# Altium PCB PCB3.pcbdoc
Units mil, origin at the board's own origin, x right, y up, seen from the top; angles counter-clockwise.
Board outline 4437.01 x 5591.14 mil, 2 copper layers (Top Layer, Bottom Layer); 51 components, 35 nets, 216 pads, 8 vias.
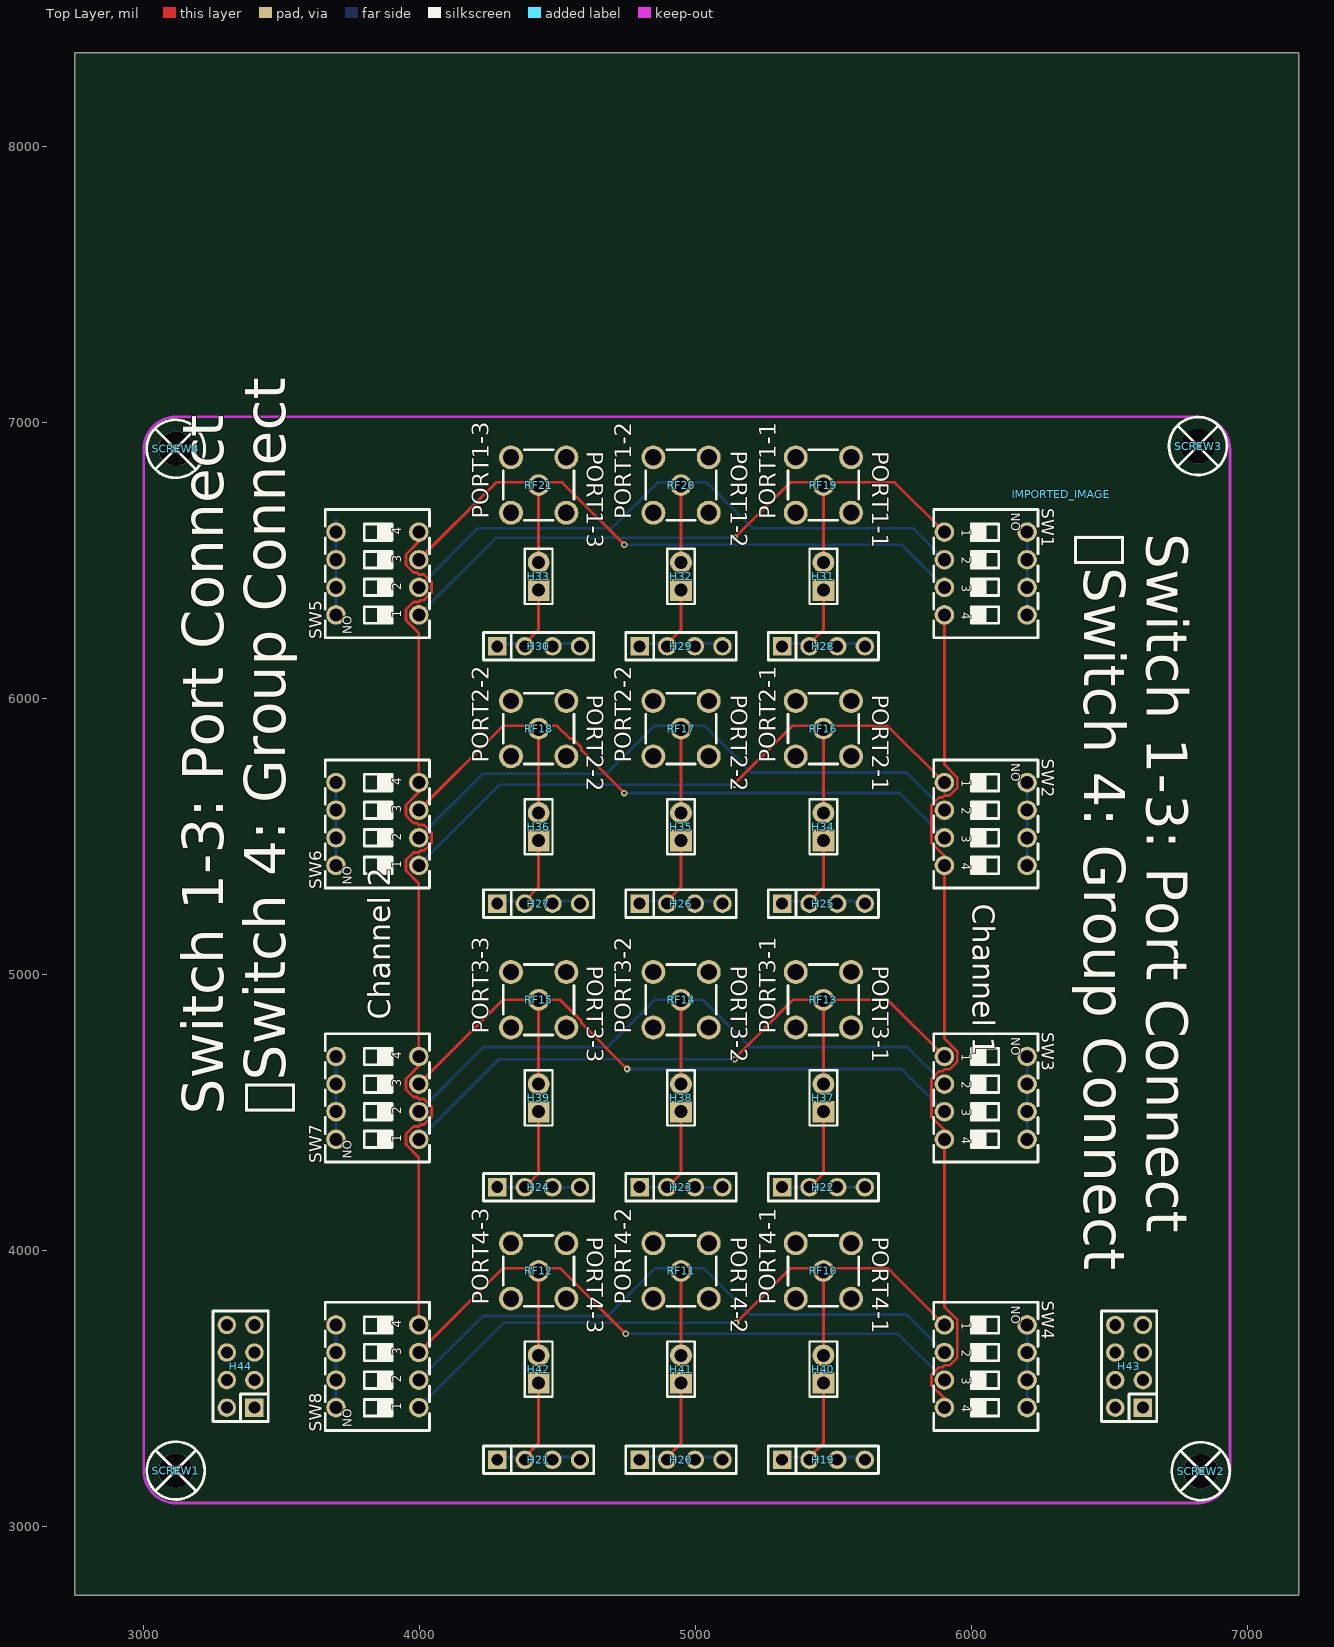
[diagram p0: Top Layer view]
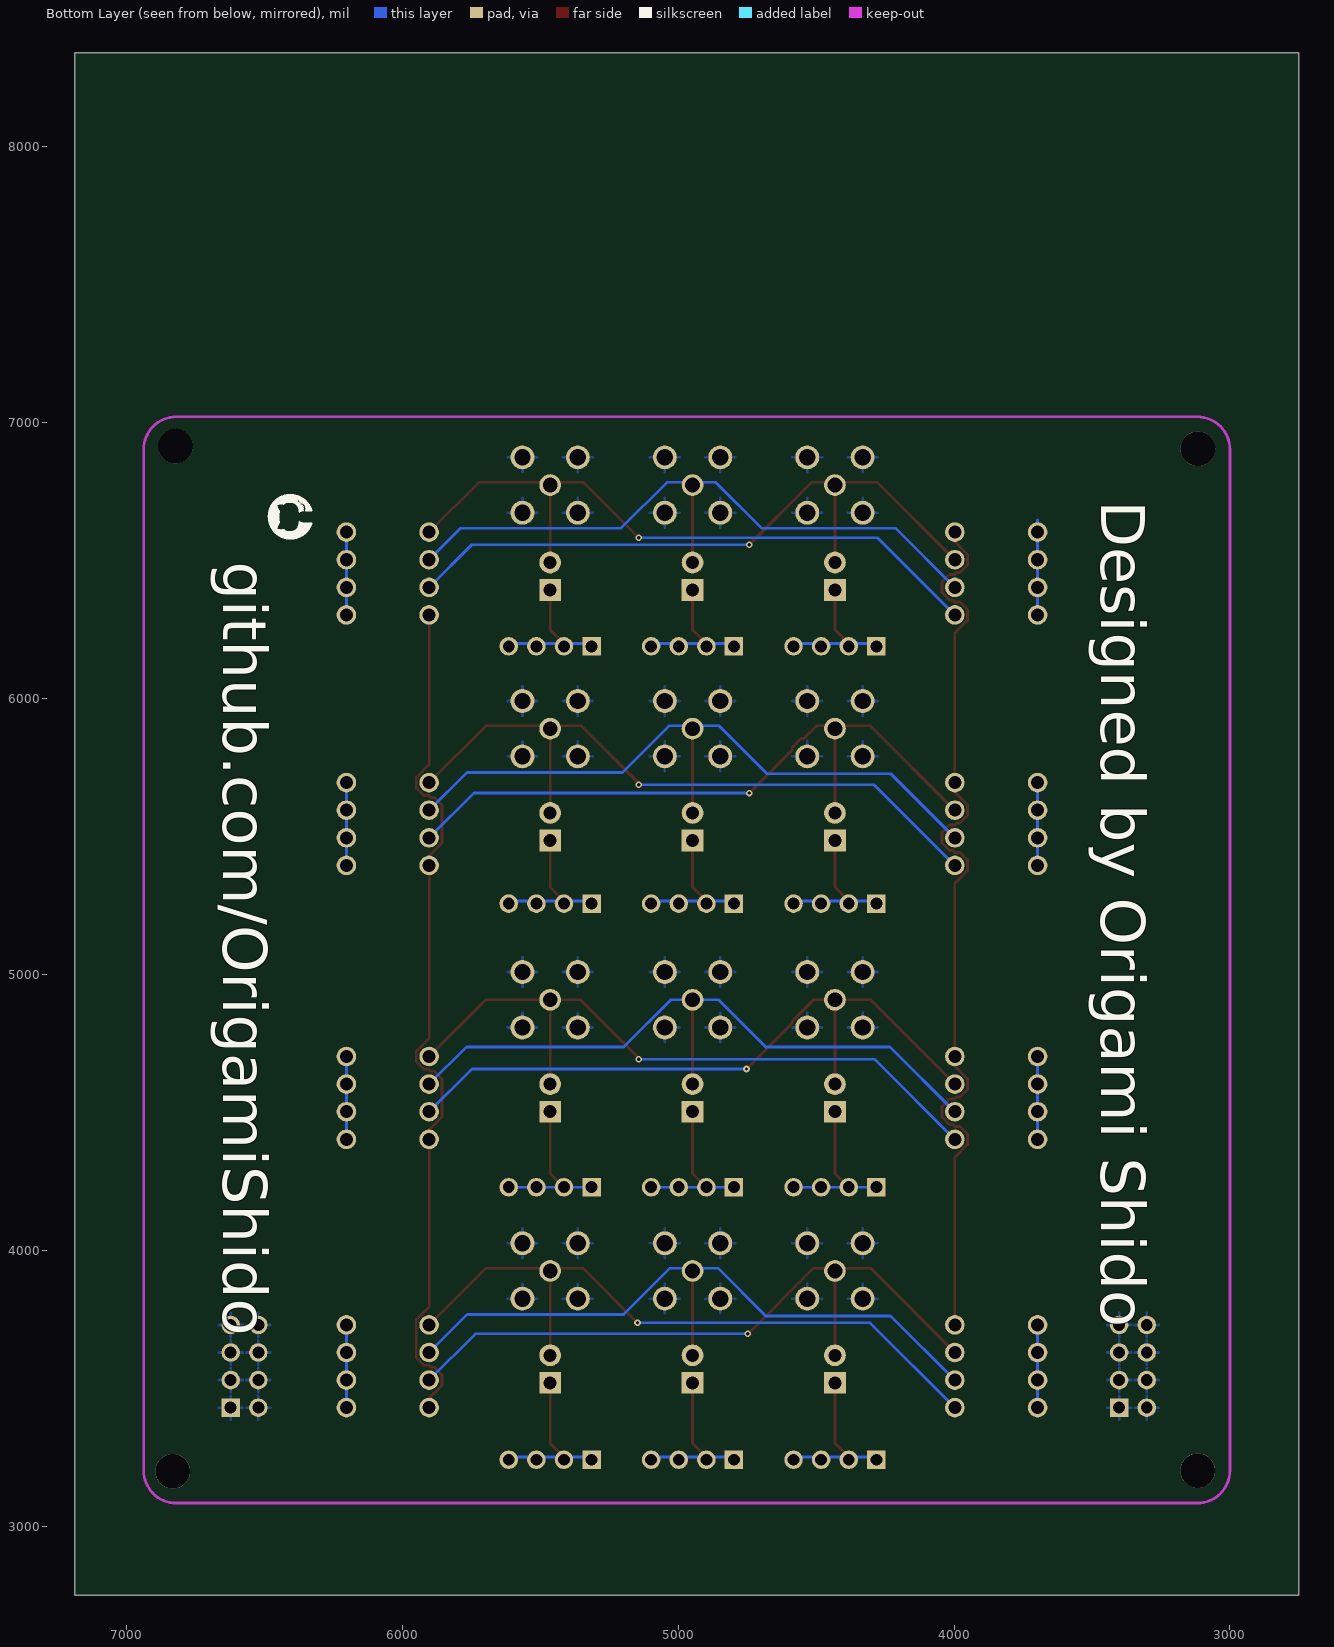
[diagram p1: Bottom Layer view, seen from below]

## Layer stack, top to bottom
Top Layer: signal copper (thickness not stored)
Dielectric: dielectric 12.6, FR-4, Dk 4.8
Bottom Layer: signal copper (thickness not stored)

## Board outline
7187.01,2750 2750,2750 2750,8341.14 7187.01,8341.14

## Design rules (kind name [scope] priority, off if disabled: settings)
BoardOutlineClearance copperThickness1oz [All] p0: genericclearance=10 ignorepadtopadclearanceinfootprint=FALSE except(0: Arc-SplitContinuation Track-SplitContinuation SMDPad-SplitContinuation THPad-SplitContinuation Via-SplitContinuation Fill-SplitContinuation Poly-SplitContinuation Region-SplitContinuation Text-SplitContinuation; 6: Track-CutoutEdge SMDPad-CutoutEdge THPad-CutoutEdge Via-CutoutEdge Region-CutoutEdge; 11.8: Track-OutlineEdge SMDPad-OutlineEdge THPad-OutlineEdge Via-OutlineEdge Fill-OutlineEdge Region-OutlineEdge Poly-OutlineEdge Text-OutlineEdge Fill-CutoutEdge)
BoardOutlineClearance copperThickness2oz [All] p0: genericclearance=10 ignorepadtopadclearanceinfootprint=FALSE except(0: Arc-SplitContinuation Track-SplitContinuation SMDPad-SplitContinuation THPad-SplitContinuation Via-SplitContinuation Fill-SplitContinuation Poly-SplitContinuation Region-SplitContinuation Text-SplitContinuation; 6: Track-CutoutEdge SMDPad-CutoutEdge THPad-CutoutEdge Via-CutoutEdge Region-CutoutEdge; 11.8: Track-OutlineEdge SMDPad-OutlineEdge THPad-OutlineEdge Via-OutlineEdge Fill-OutlineEdge Region-OutlineEdge Poly-OutlineEdge Text-OutlineEdge Fill-CutoutEdge)
Clearance copperThickness1oz [(InNet('$1N5435') OR InNet('$1N5447') OR InNet('$1N5308') OR InNet('$1N5399') OR InNet('$1N5411') OR InNet('$1N5423') OR InNet('$1N5363') OR InNet('$1N5375') OR InNet('$1N5387') OR InNet('$1N5101') OR InNet('$1N5339') OR InNet('$1N5351') OR InNet('$1N5094') OR InNet('$1N5332') OR InNet('$1N5344') OR InNet('$1N5356') OR InNet('$1N5368') OR InNet('$1N5380') OR InNet('$1N5392') OR InNet('$1N5404') OR InNet('$1N5416') OR InNet('$1N5428') OR InNet('$1N5440') OR InNet('$1N5451') OR InNet('GND') OR InNet('$1N5611') OR InNet('$1N5702') OR InNet('$1N5632') OR InNet('$1N5654') OR InNet('$1N5734') OR InNet('$1N8243') OR InNet('$1N8799') OR InNet('$1N8264') OR InNet('$1N8286') OR InNet('$1N8697'))] p1: gap=7 ignorepadtopadclearanceinfootprint=FALSE except(4: Track-Track; 6: Track-SMDPad SMDPad-SMDPad Track-THPad SMDPad-THPad THPad-THPad Track-Via SMDPad-Via THPad-Via Via-Via SMDPad-Fill THPad-Fill Via-Fill Fill-Fill Track-Region SMDPad-Region THPad-Region Via-Region Region-Region Track-Poly SMDPad-Poly THPad-Poly Via-Poly Fill-Poly Region-Poly Poly-Poly Track-Text SMDPad-Text THPad-Text Via-Text Fill-Text Region-Text Poly-Text Text-Text; 6.9: Track-Hole SMDPad-Hole THPad-Hole Via-Hole Fill-Hole Region-Hole Poly-Hole Text-Hole Sheet-Hole; 11.8: Track-Fill Fill-Region Track-Sheet SMDPad-Sheet THPad-Sheet Via-Sheet Fill-Sheet Region-Sheet Poly-Sheet Text-Sheet)
Clearance copperThickness2oz [All] p1: gap=7 ignorepadtopadclearanceinfootprint=FALSE except(6: Track-SMDPad SMDPad-SMDPad Track-THPad SMDPad-THPad THPad-THPad Track-Via SMDPad-Via THPad-Via Via-Via SMDPad-Fill THPad-Fill Via-Fill Fill-Fill Track-Region SMDPad-Region THPad-Region Via-Region Region-Region Track-Poly SMDPad-Poly THPad-Poly Via-Poly Fill-Poly Region-Poly Poly-Poly Track-Text SMDPad-Text THPad-Text Via-Text Fill-Text Region-Text Poly-Text Text-Text; 6.9: Track-Hole SMDPad-Hole THPad-Hole Via-Hole Fill-Hole Region-Hole Poly-Hole Text-Hole Sheet-Hole; 8: Track-Track; 11.8: Track-Fill Fill-Region Track-Sheet SMDPad-Sheet THPad-Sheet Via-Sheet Fill-Sheet Region-Sheet Poly-Sheet Text-Sheet)
DiffPairsRouting differentialPair [All] p1: maxuncoupledlength=10 minlimit=6 maxlimit=6 mostfreqgap=6 toplayer_minwidth=5 toplayer_prefwidth=10 toplayer_maxwidth=100 bottomlayer_minwidth=5 bottomlayer_prefwidth=10 bottomlayer_maxwidth=100
PasteMaskExpansion pasteMaskExpansion [All] p1: expansion=0
PlaneConnect innerPlane [All] p1: planeconnectstyle=Relief reliefexpansion=20 reliefentries=4 reliefconductorwidth=10 reliefairgap=10
PolygonConnect copperRegion [All] p1: connectstyle=Relief reliefentries=4 reliefconductorwidth=10 polygonreliefangle="90 Angle" airgapwidth=10
RoutingVias viaSize [All] p1: viastyle="Through Hole" holewidth=12.0078 minholewidth=11.811 maxholewidth=248.0314 width=24.0158 minwidth=19.685 maxwidth=393.7008
SolderMaskExpansion solderMaskExpansion [All] p1: useseparateexpansions=TRUE expansion=2 expansionbottom=2
Width copperThickness1oz [All] p1: maxlimit=100 minlimit=5 preferedwidth=10
Width copperThickness2oz [All] p1: maxlimit=100 minlimit=8 preferedwidth=10

## Components (designator, comment, footprint, x,y, rotation, side; value= is the part's Value field where it differs from the comment)
H19 "PZ254V-11-04P" HDR-TH_4P-P2.54-V-M 5463.74,3241.4 r0 top
H20 "PZ254V-11-04P" HDR-TH_4P-P2.54-V-M 4947.63,3241.4 r0 top
H21 "PZ254V-11-04P" HDR-TH_4P-P2.54-V-M 4431.53,3241.4 r0 top
H22 "PZ254V-11-04P" HDR-TH_4P-P2.54-V-M 5463.74,4229.14 r0 top
H23 "PZ254V-11-04P" HDR-TH_4P-P2.54-V-M 4947.63,4229.14 r0 top
H24 "PZ254V-11-04P" HDR-TH_4P-P2.54-V-M 4431.53,4229.14 r0 top
H25 "PZ254V-11-04P" HDR-TH_4P-P2.54-V-M 5463.74,5256.88 r0 top
H26 "PZ254V-11-04P" HDR-TH_4P-P2.54-V-M 4947.63,5256.88 r0 top
H27 "PZ254V-11-04P" HDR-TH_4P-P2.54-V-M 4431.53,5256.88 r0 top
H28 "PZ254V-11-04P" HDR-TH_4P-P2.54-V-M 5463.74,6189.63 r0 top
H29 "PZ254V-11-04P" HDR-TH_4P-P2.54-V-M 4947.63,6189.63 r0 top
H30 "PZ254V-11-04P" HDR-TH_4P-P2.54-V-M 4431.53,6189.63 r0 top
H31 "PZ254V-11-02P" HDR-TH_2P-P2.54-V-M 5463.74,6443.31 r90 top
H32 "PZ254V-11-02P" HDR-TH_2P-P2.54-V-M 4947.63,6443.31 r90 top
H33 "PZ254V-11-02P" HDR-TH_2P-P2.54-V-M 4431.53,6443.31 r90 top
H34 "PZ254V-11-02P" HDR-TH_2P-P2.54-V-M 5463.74,5535.57 r90 top
H35 "PZ254V-11-02P" HDR-TH_2P-P2.54-V-M 4947.63,5535.57 r90 top
H36 "PZ254V-11-02P" HDR-TH_2P-P2.54-V-M 4431.53,5535.57 r90 top
H37 "PZ254V-11-02P" HDR-TH_2P-P2.54-V-M 5463.74,4552.83 r90 top
H38 "PZ254V-11-02P" HDR-TH_2P-P2.54-V-M 4947.63,4552.83 r90 top
H39 "PZ254V-11-02P" HDR-TH_2P-P2.54-V-M 4431.53,4552.83 r90 top
H40 "PZ254V-11-02P" HDR-TH_2P-P2.54-V-M 5463.74,3570.08 r90 top
H41 "PZ254V-11-02P" HDR-TH_2P-P2.54-V-M 4947.63,3570.08 r90 top
H42 "PZ254V-11-02P" HDR-TH_2P-P2.54-V-M 4431.53,3570.08 r90 top
H43 "PZ254V-12-8P" HDR-TH_8P-P2.54-V-M-R2-C4-S2.54 6571.43,3580.08 r90 top
H44 "PZ254V-12-8P" HDR-TH_8P-P2.54-V-M-R2-C4-S2.54 3351.43,3580.08 r90 top
IMPORTED_IMAGE "IMPORTED_IMAGE" IMPORTED_IMAGE 6326.43,6740.8 r0 top
RF10 "BWSMA-KE-Z001_C496549" SMA-TH_BWSMA-KE-Z001 5463.74,3925.75 r270 top
RF11 "BWSMA-KE-Z001_C496549" SMA-TH_BWSMA-KE-Z001 4947.63,3925.75 r270 top
RF12 "BWSMA-KE-Z001_C496549" SMA-TH_BWSMA-KE-Z001 4431.53,3925.75 r270 top
RF13 "BWSMA-KE-Z001_C496549" SMA-TH_BWSMA-KE-Z001 5463.74,4908.5 r270 top
RF14 "BWSMA-KE-Z001_C496549" SMA-TH_BWSMA-KE-Z001 4947.63,4908.5 r270 top
RF15 "BWSMA-KE-Z001_C496549" SMA-TH_BWSMA-KE-Z001 4431.53,4908.5 r270 top
RF16 "BWSMA-KE-Z001_C496549" SMA-TH_BWSMA-KE-Z001 5463.74,5891.24 r270 top
RF17 "BWSMA-KE-Z001_C496549" SMA-TH_BWSMA-KE-Z001 4947.63,5891.24 r270 top
RF18 "BWSMA-KE-Z001_C496549" SMA-TH_BWSMA-KE-Z001 4431.53,5891.24 r270 top
RF19 "BWSMA-KE-Z001_C496549" SMA-TH_BWSMA-KE-Z001 5463.74,6773.98 r270 top
RF20 "BWSMA-KE-Z001_C496549" SMA-TH_BWSMA-KE-Z001 4947.63,6773.98 r270 top
RF21 "BWSMA-KE-Z001_C496549" SMA-TH_BWSMA-KE-Z001 4431.53,6773.98 r270 top
SCREW1 "M3螺丝" M3螺丝 3116.43,3201.95 r0 top
SCREW2 "M3螺丝" M3螺丝 6831.33,3200 r0 top
SCREW3 "M3螺丝" M3螺丝 6821.33,6915.31 r0 top
SCREW4 "M3螺丝" M3螺丝 3116.02,6905.31 r0 top
SW1 "DSWB04LHGET" SW-TH_DSWB04LHGET 6052.16,6453.31 r270 top
SW2 "DSWB04LHGET" SW-TH_DSWB04LHGET 6052.16,5545.57 r270 top
SW3 "DSWB04LHGET" SW-TH_DSWB04LHGET 6052.16,4552.83 r270 top
SW4 "DSWB04LHGET" SW-TH_DSWB04LHGET 6052.16,3580.08 r270 top
SW5 "DSWB04LHGET" SW-TH_DSWB04LHGET 3847.16,6453.31 r90 top
SW6 "DSWB04LHGET" SW-TH_DSWB04LHGET 3847.16,5545.57 r90 top
SW7 "DSWB04LHGET" SW-TH_DSWB04LHGET 3847.16,4552.83 r90 top
SW8 "DSWB04LHGET" SW-TH_DSWB04LHGET 3847.16,3580.08 r90 top

## Footprints (in the part's own frame and the unit in brackets; to place one, negate y for a bottom-side part, rotate by r counter-clockwise, add the part's x,y. Pads: shape width x height; smd on the part's side, far side on the other; paste and mask are expansions set on the pad)
HDR-TH_2P-P2.54-V-M [mm]
  rect 2x2 hole 1.2: 1(-1.27,0)
  round 2 hole 1.2: 2(1.27,0)
  silkscreen extent -2.54,-1.27 2.54,1.27
HDR-TH_4P-P2.54-V-M [mm]
  rect 1.7x1.7 hole 1.1: 1(-3.81,0)
  round 1.7 hole 1.1: 2(-1.27,0) 3(1.27,0) 4(3.81,0)
  silkscreen extent -5.08,-1.27 5.08,1.27
HDR-TH_8P-P2.54-V-M-R2-C4-S2.54 [mm]
  rect 1.7x1.7 hole 1.1: 1(-3.81,-1.27)
  round 1.7 hole 1.1: 2(-3.81,1.27) 3(-1.27,-1.27) 4(-1.27,1.27) 5(1.27,-1.27) 6(1.27,1.27) 7(3.81,-1.27) 8(3.81,1.27)
  silkscreen extent -5.08,-2.54 5.08,2.54
IMPORTED_IMAGE [mil]
M3螺丝 [mil]
  round 126 hole 126: 1(0,0)
  silkscreen extent -105,-105 105,105
SMA-TH_BWSMA-KE-Z001 [mm]
  round 2.2 hole 1.5: 1(-2.55,-2.55) 2(-2.55,2.55) 3(2.55,2.55)
  round 2.2 hole 1.5 copper offset 0,0: 4(2.55,-2.55)
  round 2 hole 1.35: 5(0,0)
  silkscreen extent -3.25,-3.25 3.25,3.25
SW-TH_DSWB04LHGET [mm]
  round 1.8 hole 1.2: 1(-3.81,3.81) 2(-1.27,3.81) 3(1.27,3.81) 4(3.81,3.81) 5(-3.81,-3.81) 6(-1.27,-3.81) 7(1.27,-3.81) 8(3.81,-3.81)
  silkscreen extent -5.9,-4.8 5.9,4.8

## Via types
v1: diameter 24.02, hole 12.01, Top Layer to Bottom Layer, 8 vias

## Nets (pads, with @x,y where several pads share a name; then routed paths per layer and width w, separated by ;. In a path a pad name is that pad's centre, name@x,y a point inside that pad or via, vN(x,y) a via of type N, cw(c..) or ccw(c..) an arc to the next point about the centre after c; other vN are vias at no path point)
$1N5094: H31.2 RF19.5 SW1.5 SW5.5 | length 2459.6
  Top Layer w10: v1(5142.16,6582.68) 5343.47,6783.99 RF19.5@5463.74,6783.99 ; H31.2@5463.74,6503.32 RF19.5@5463.74,6783.99 ; SW1.5 5721.49,6783.99 RF19.5@5463.74,6783.99
  Bottom Layer w10: SW5.5 4276.54,6582.68 v1(5142.16,6582.68)
$1N5101: H28.1 H28.2 H28.3 H28.4 H31.1 | length 524.4
  Top Layer w10: H28.2@5413.73,6199.63 5463.73,6249.63 H31.1@5463.73,6403.31
  Bottom Layer w10: H28.1@5313.73,6199.63 H28.4@5613.73,6199.63
$1N5308: H21.1 H21.2 H21.3 H21.4 H42.1 | length 599.4
  Top Layer w10: H21.2@4381.53,3251.4 4431.53,3301.4 H42.1@4431.53,3530.08
  Bottom Layer w10: H21.1@4281.53,3251.4 H21.4@4581.53,3251.4
$1N5332: H32.2 RF20.5 SW1.6 SW5.6 | length 2459.6
  Top Layer w10: H32.2@4947.64,6503.32 RF20.5@4947.64,6783.99
  Bottom Layer w10: SW5.6 4211.54,6617.68 4697.16,6617.68 4863.47,6783.99 5040.86,6783.99 5207.16,6617.68 5787.79,6617.68 SW1.6
$1N5339: H29.1 H29.2 H29.3 H29.4 H32.1 | length 524.4
  Top Layer w10: H29.2@4897.63,6199.63 4947.63,6249.63 H32.1@4947.63,6403.31
  Bottom Layer w10: H29.1@4797.63,6199.63 H29.4@5097.63,6199.63
$1N5344: H33.2 RF21.5 SW1.7 SW5.7 | length 2459.6
  Top Layer w10: SW5.7 4277.84,6783.99 RF21.5@4431.54,6783.99 ; H33.2@4431.54,6503.32 RF21.5@4431.54,6783.99 ; v1(4742.16,6557.68) 4515.86,6783.99 RF21.5@4431.54,6783.99
  Bottom Layer w10: v1(4742.16,6557.68) 5747.79,6557.68 SW1.7
$1N5351: H30.1 H30.2 H30.3 H30.4 H33.1 | length 524.4
  Top Layer w10: H30.2@4381.53,6199.63 4431.53,6249.63 H33.1@4431.53,6403.31
  Bottom Layer w10: H30.1@4281.53,6199.63 H30.4@4581.53,6199.63
$1N5356: H34.2 RF16.5 SW2.5 SW6.5 | length 2505.3
  Top Layer w10: v1@5137.16,5687.68 5350.73,5901.24 RF16.5@5463.74,5901.24 ; H34.2@5463.74,5595.57 RF16.5@5463.74,5901.24 ; SW2.5 5696.49,5901.24 RF16.5@5463.74,5901.24
  Bottom Layer w10: SW6.5 4289.28,5687.68 v1@5137.16,5687.68
  other v1: 5142.16,5687.68
$1N5363: H25.1 H25.2 H25.3 H25.4 H34.1 | length 549.4
  Top Layer w10: H25.2@5413.73,5266.88 5463.73,5316.88 H34.1@5463.73,5495.57
  Bottom Layer w10: H25.1@5313.73,5266.88 H25.4@5613.73,5266.88
$1N5368: H35.2 RF17.5 SW2.6 SW6.6 | length 2505.3
  Top Layer w10: H35.2@4947.64,5595.57 RF17.5@4947.64,5901.24
  Bottom Layer w10: SW6.6 4229.28,5727.68 4677.16,5727.68 4850.73,5901.24 5033.6,5901.24 5202.16,5732.68 5765.05,5732.68 SW2.6
$1N5375: H26.1 H26.2 H26.3 H26.4 H35.1 | length 549.4
  Top Layer w10: H26.2@4897.63,5266.88 4947.63,5316.88 H35.1@4947.63,5495.57
  Bottom Layer w10: H26.1@4797.63,5266.88 H26.4@5097.63,5266.88
$1N5380: H36.2 RF18.5 SW2.7 SW6.7 | length 2511
  Top Layer w10: SW6.7 4302.84,5901.24 RF18.5@4431.54,5901.24 ; H36.2@4431.54,5595.57 RF18.5@4431.54,5901.24 ; v1(4742.16,5657.68) 4586.22,5813.63 4586.22,5823.33 4554.41,5855.13 4544.71,5855.13 4498.6,5901.24 RF18.5@4431.54,5901.24
  Bottom Layer w10: v1(4742.16,5657.68) 5740.05,5657.68 SW2.7
$1N5387: H27.1 H27.2 H27.3 H27.4 H36.1 | length 549.4
  Top Layer w10: H27.2@4381.53,5266.88 4431.53,5316.88 H36.1@4431.53,5495.57
  Bottom Layer w10: H27.1@4281.53,5266.88 H27.4@4581.53,5266.88
$1N5392: H37.2 RF13.5 SW3.5 SW7.5 | length 2505.3
  Top Layer w10: v1@5137.16,4692.68 5352.98,4908.5 RF13.5 ; H37.2 RF13.5 ; SW3.5 5696.49,4908.5 RF13.5
  Bottom Layer w10: SW7.5 4287.02,4692.68 v1@5137.16,4692.68
  other v1: 5142.16,4692.68
$1N5399: H22.1 H22.2 H22.3 H22.4 H37.1 | length 594.4
  Top Layer w10: H22.2 5463.73,4279.14 H37.1
  Bottom Layer w10: H22.1 H22.2 H22.3 H22.4
$1N5404: H38.2 RF14.5 SW3.6 SW7.6 | length 2505.3
  Top Layer w10: H38.2 RF14.5
  Bottom Layer w10: SW7.6 4232.02,4737.68 4682.16,4737.68 4852.98,4908.5 RF14.5 5026.35,4908.5 5197.16,4737.68 5767.31,4737.68 SW3.6
$1N5411: H23.1 H23.2 H23.3 H23.4 H38.1 | length 594.4
  Top Layer w10: H23.2 4947.63,4279.14 H38.1
  Bottom Layer w10: H23.1 H23.2 H23.3 H23.4
$1N5416: H39.2 RF15.5 SW3.7 SW7.7 | length 2509.4
  Top Layer w10: SW7.7 4302.84,4908.5 RF15.5 ; H39.2 RF15.5 ; v1(4752.16,4657.68) 4586.22,4823.63 4586.22,4830.59 4508.31,4908.5 RF15.5
  Bottom Layer w10: v1(4752.16,4657.68) 5747.31,4657.68 SW3.7
$1N5423: H24.1 H24.2 H24.3 H24.4 H39.1 | length 594.4
  Top Layer w10: H24.2 4431.53,4279.14 H39.1
  Bottom Layer w10: H24.1 H24.2 H24.3 H24.4
$1N5428: H40.2 RF10.5 SW4.5 SW8.5 | length 2505.3
  Top Layer w10: v1(5147.16,3737.68) 5345.24,3935.76 RF10.5@5463.74,3935.76 ; H40.2@5463.74,3630.09 RF10.5@5463.74,3935.76 ; SW4.5 5696.49,3935.76 RF10.5@5463.74,3935.76
  Bottom Layer w10: SW8.5 4304.76,3737.68 v1(5147.16,3737.68)
$1N5435: H19.1 H19.2 H19.3 H19.4 H40.1 | length 599.4
  Top Layer w10: H19.2@5413.73,3251.4 5463.73,3301.4 H40.1@5463.73,3530.08
  Bottom Layer w10: H19.1@5313.73,3251.4 H19.4@5613.73,3251.4
$1N5440: H41.2 RF11.5 SW4.6 SW8.6 | length 2505.3
  Top Layer w10: H41.2@4947.64,3630.09 RF11.5@4947.64,3935.76
  Bottom Layer w10: SW8.6 4229.76,3762.68 4682.16,3762.68 4855.24,3935.76 5029.09,3935.76 5197.16,3767.68 5764.57,3767.68 SW4.6
$1N5447: H20.1 H20.2 H20.3 H20.4 H41.1 | length 599.4
  Top Layer w10: H20.2@4897.63,3251.4 4947.63,3301.4 H41.1@4947.63,3530.08
  Bottom Layer w10: H20.1@4797.63,3251.4 H20.4@5097.63,3251.4
$1N5451: H42.2 RF12.5 SW4.7 SW8.7 | length 2505.3
  Top Layer w10: SW8.7 4302.84,3935.76 RF12.5@4431.54,3935.76 ; H42.2@4431.54,3630.09 RF12.5@4431.54,3935.76 ; v1(4747.16,3697.68) 4509.09,3935.76 RF12.5@4431.54,3935.76
  Bottom Layer w10: v1(4747.16,3697.68) 5734.57,3697.68 SW4.7
$1N5611: SW1.1 SW1.2 SW1.3 SW1.4 | length 300
  Bottom Layer w10: SW1.4@6202.16,6302.68 SW1.3 SW1.2 SW1.1@6202.16,6602.68
$1N5632: SW2.1 SW2.2 SW2.3 SW2.4 | length 300
  Bottom Layer w10: SW2.4@6202.16,5392.68 SW2.3 SW2.2 SW2.1@6202.16,5692.68
$1N5654: SW3.1 SW3.2 SW3.3 SW3.4 | length 300
  Bottom Layer w10: SW3.4@6202.16,4402.68 SW3.3 SW3.2 SW3.1@6202.16,4702.68
$1N5702: SW1.8 SW2.8 SW3.8 SW4.8 | length 3158.9
  Top Layer w10: SW4.8 5902.16,3464.44 5855.75,3510.86 5855.75,3549.31 5882.94,3576.5 5895,3576.5 5902.16,3583.67 5921.39,3583.67 5948.58,3610.86 5948.58,3749.31 5902.16,3795.73 SW3.8 5902.16,4437.18 5855.75,4483.6 5855.75,4622.05 5882.94,4649.24 5895,4649.24 5902.16,4656.41 5921.39,4656.41 5948.58,4683.6 5948.58,4722.05 5902.16,4768.47 SW2.8 5902.16,5429.92 5855.75,5476.34 5855.75,5614.79 5882.94,5641.99 5895,5641.99 5902.16,5649.15 5921.39,5649.15 5948.58,5676.34 5948.58,5714.79 5902.16,5761.21 SW1.8
$1N5734: SW4.1 SW4.2 SW4.3 SW4.4 | length 300
  Bottom Layer w10: SW4.4@6202.16,3422.68 SW4.3 SW4.2 SW4.1@6202.16,3722.68
$1N8243: SW5.1 SW5.2 SW5.3 SW5.4 | length 344.4
  Bottom Layer w10: SW5.1 SW5.2 SW5.3 SW5.4 3697.16,6647.68
$1N8264: SW6.1 SW6.2 SW6.3 SW6.4 | length 300
  Bottom Layer w10: SW6.1@3697.16,5417.68 SW6.2 SW6.3 SW6.4@3697.16,5717.68
$1N8286: SW7.1 SW7.2 SW7.3 SW7.4 | length 300
  Bottom Layer w10: SW7.1@3697.16,4392.68 SW7.2 SW7.3 SW7.4@3697.16,4692.68
$1N8697: SW8.1 SW8.2 SW8.3 SW8.4 | length 300
  Bottom Layer w10: SW8.1@3697.16,3422.68 SW8.2 SW8.3 SW8.4@3697.16,3722.68
$1N8799: SW5.8 SW6.8 SW7.8 SW8.8 | length 3329.3
  Top Layer w10: SW8.8 3997.16,4337.18 3950.75,4383.6 3950.75,4422.05 3977.94,4449.24 3997.16,4449.24 4004.33,4456.41 4016.39,4456.41 4043.58,4483.6 4043.58,4522.05 4016.39,4549.24 3997.16,4549.24 3990,4556.41 3977.94,4556.41 3950.75,4583.6 3950.75,4622.05 3997.16,4668.47 SW7.8 3997.16,5329.92 3950.75,5376.34 3950.75,5414.79 3977.94,5441.99 3997.16,5441.99 4004.33,5449.15 4016.39,5449.15 4043.58,5476.34 4043.58,5514.79 4016.39,5541.99 3997.16,5541.99 3990,5549.15 3977.94,5549.15 3950.75,5576.34 3950.75,5614.79 3997.16,5661.21 SW6.8 3997.16,6237.67 3950.75,6284.08 3950.75,6322.54 3977.94,6349.73 3997.16,6349.73 4004.33,6356.89 4016.39,6356.89 4043.58,6384.08 4043.58,6422.54 4016.39,6449.73 3997.16,6449.73 3990,6456.89 3977.94,6456.89 3950.75,6484.08 3950.75,6522.54 3997.16,6568.95 SW5.8
GND: H43.1 H43.2 H43.3 H43.4 H43.5 H43.6 H43.7 H43.8 H44.1 H44.2 H44.3 H44.4 H44.5 H44.6 H44.7 H44.8 RF10.1 RF10.2 RF10.3 RF10.4 RF11.1 RF11.2 RF11.3 RF11.4 RF12.1 RF12.2 RF12.3 RF12.4 RF13.1 RF13.2 RF13.3 RF13.4 RF14.1 RF14.2 RF14.3 RF14.4 RF15.1 RF15.2 RF15.3 RF15.4 RF16.1 RF16.2 RF16.3 RF16.4 RF17.1 RF17.2 RF17.3 RF17.4 RF18.1 RF18.2 RF18.3 RF18.4 RF19.1 RF19.2 RF19.3 RF19.4 RF20.1 RF20.2 RF20.3 RF20.4 RF21.1 RF21.2 RF21.3 RF21.4
pads on no net: SCREW1.1 SCREW2.1 SCREW3.1 SCREW4.1

## Polygon pours and split planes (outlines as drawn)
GND on Bottom Layer (solid, remove dead copper, pour order 0): 3116.02,6905.31 6831.33,6905.31 6831.33,3200 3116.02,3200

## Keep-outs
Board Outline Layer:
  lines w10: 3000,3202.43 ccw(c3118.11,3202.43) 3118.11,3084.32 6818.9,3084.32 ccw(c6818.9,3202.43) 6937.01,3202.43 6937.01,6903.22 ccw(c6818.9,6903.22) 6818.9,7021.33 3118.11,7021.33 ccw(c3118.11,6903.22) 3000,6903.22 3000,3202.43

## Silkscreen, mask and mechanical layers (free items; w line width, h text height)
Top Silkscreen Layer:
  text "PORT1-3" at 4606.43,6896.99 h60 r270
  text "PORT1-2" at 5128.66,6897.44 h60 r270
  text "PORT1-1" at 5640.09,6897.08 h60 r270
  text "PORT1-3" at 4251.43,6650.99 h60 r90
  text "PORT1-2" at 4766.43,6650.53 h60 r90
  text "PORT1-1" at 5291.43,6650.89 h60 r90
  text "Switch 1-3: Port Connect /  Switch 4: Group Connect" at 6409.84,6600 h150 r270
  text "PORT2-2" at 4606.48,6014.7 h60 r270
  text "PORT2-2" at 5128.66,6014.7 h60 r270
  text "PORT2-1" at 5640.09,6014.33 h60 r270
  text "PORT2-2" at 4251.39,5767.79 h60 r90
  text "PORT2-2" at 4766.43,5767.79 h60 r90
  text "PORT2-1" at 5291.43,5768.15 h60 r90
  text "Channel 1" at 6005.02,5256.95 h80 r270
  text "PORT3-3" at 4606.43,5031.5 h60 r270
  text "PORT3-2" at 5128.66,5031.96 h60 r270
  text "PORT3-1" at 5640.09,5031.59 h60 r270
  text "Channel 2" at 3894.31,4836.95 h80 r90
  text "PORT3-3" at 4251.43,4785.5 h60 r90
  text "PORT3-2" at 4766.43,4785.05 h60 r90
  text "PORT3-1" at 5291.43,4785.41 h60 r90
  text "Switch 1-3: Port Connect /  Switch 4: Group Connect" at 3513.02,4491.14 h150 r90
  text "PORT4-3" at 4606.43,4048.76 h60 r270
  text "PORT4-2" at 5128.66,4049.21 h60 r270
  text "PORT4-1" at 5640.09,4048.85 h60 r270
  text "PORT4-3" at 4251.43,3802.76 h60 r90
  text "PORT4-1" at 5291.43,3802.67 h60 r90
  text "PORT4-2" at 4766.43,3802.3 h60 r90
Bottom Silkscreen Layer:
  text "Designed by Origami Shido" at 3466.43,6717.45 h160 r90
  text "github.com/OrigamiShido" at 6648.61,6495.8 h160 r90

## Text inside footprints (layer, text, board x,y; h text height)
SW1: Top Silkscreen Layer "NO" at 6144.96,6673.31 h31.5 r270; Top Silkscreen Layer "1" at 5964.96,6613.31 h31.5 r270; Top Silkscreen Layer "2" at 5964.96,6513.31 h31.5 r270; Top Silkscreen Layer "3" at 5964.96,6413.31 h31.5 r270; Top Silkscreen Layer "4" at 5964.96,6313.31 h31.5 r270
SW2: Top Silkscreen Layer "NO" at 6144.96,5765.57 h31.5 r270; Top Silkscreen Layer "1" at 5964.96,5705.57 h31.5 r270; Top Silkscreen Layer "2" at 5964.96,5605.57 h31.5 r270; Top Silkscreen Layer "3" at 5964.96,5505.57 h31.5 r270; Top Silkscreen Layer "4" at 5964.96,5405.57 h31.5 r270
SW3: Top Silkscreen Layer "NO" at 6144.96,4772.83 h31.5 r270; Top Silkscreen Layer "1" at 5964.96,4712.83 h31.5 r270; Top Silkscreen Layer "2" at 5964.96,4612.83 h31.5 r270; Top Silkscreen Layer "3" at 5964.96,4512.83 h31.5 r270; Top Silkscreen Layer "4" at 5964.96,4412.83 h31.5 r270
SW4: Top Silkscreen Layer "NO" at 6144.96,3800.08 h31.5 r270; Top Silkscreen Layer "1" at 5964.96,3740.08 h31.5 r270; Top Silkscreen Layer "2" at 5964.96,3640.08 h31.5 r270; Top Silkscreen Layer "3" at 5964.96,3540.08 h31.5 r270; Top Silkscreen Layer "4" at 5964.96,3440.08 h31.5 r270
SW5: Top Silkscreen Layer "NO" at 3754.36,6233.31 h31.5 r90; Top Silkscreen Layer "1" at 3934.36,6293.31 h31.5 r90; Top Silkscreen Layer "2" at 3934.36,6393.31 h31.5 r90; Top Silkscreen Layer "3" at 3934.36,6493.31 h31.5 r90; Top Silkscreen Layer "4" at 3934.36,6593.31 h31.5 r90
SW6: Top Silkscreen Layer "NO" at 3754.36,5325.57 h31.5 r90; Top Silkscreen Layer "1" at 3934.36,5385.57 h31.5 r90; Top Silkscreen Layer "2" at 3934.36,5485.57 h31.5 r90; Top Silkscreen Layer "3" at 3934.36,5585.57 h31.5 r90; Top Silkscreen Layer "4" at 3934.36,5685.57 h31.5 r90
SW7: Top Silkscreen Layer "NO" at 3754.36,4332.83 h31.5 r90; Top Silkscreen Layer "1" at 3934.36,4392.83 h31.5 r90; Top Silkscreen Layer "2" at 3934.36,4492.83 h31.5 r90; Top Silkscreen Layer "3" at 3934.36,4592.83 h31.5 r90; Top Silkscreen Layer "4" at 3934.36,4692.83 h31.5 r90
SW8: Top Silkscreen Layer "NO" at 3754.36,3360.08 h31.5 r90; Top Silkscreen Layer "1" at 3934.36,3420.08 h31.5 r90; Top Silkscreen Layer "2" at 3934.36,3520.08 h31.5 r90; Top Silkscreen Layer "3" at 3934.36,3620.08 h31.5 r90; Top Silkscreen Layer "4" at 3934.36,3720.08 h31.5 r90